# Altium PCB NBP-28 Rev 1.00.PCBDOC (part 2 of 6)
Units mil, origin at the board's own origin, x right, y up, seen from the top; angles counter-clockwise.
Board outline 2716.54 x 3917.15 mil, 8 copper layers (Top Layer, MidLayer3, MidLayer1, VCC, Gnd, VCCINT, MidLayer2, Bottom Layer), stack 59.043 mil thick; 229 components, 429 nets, 1584 pads, 1020 vias.
Unrouted connection lines stored in the file: 302.
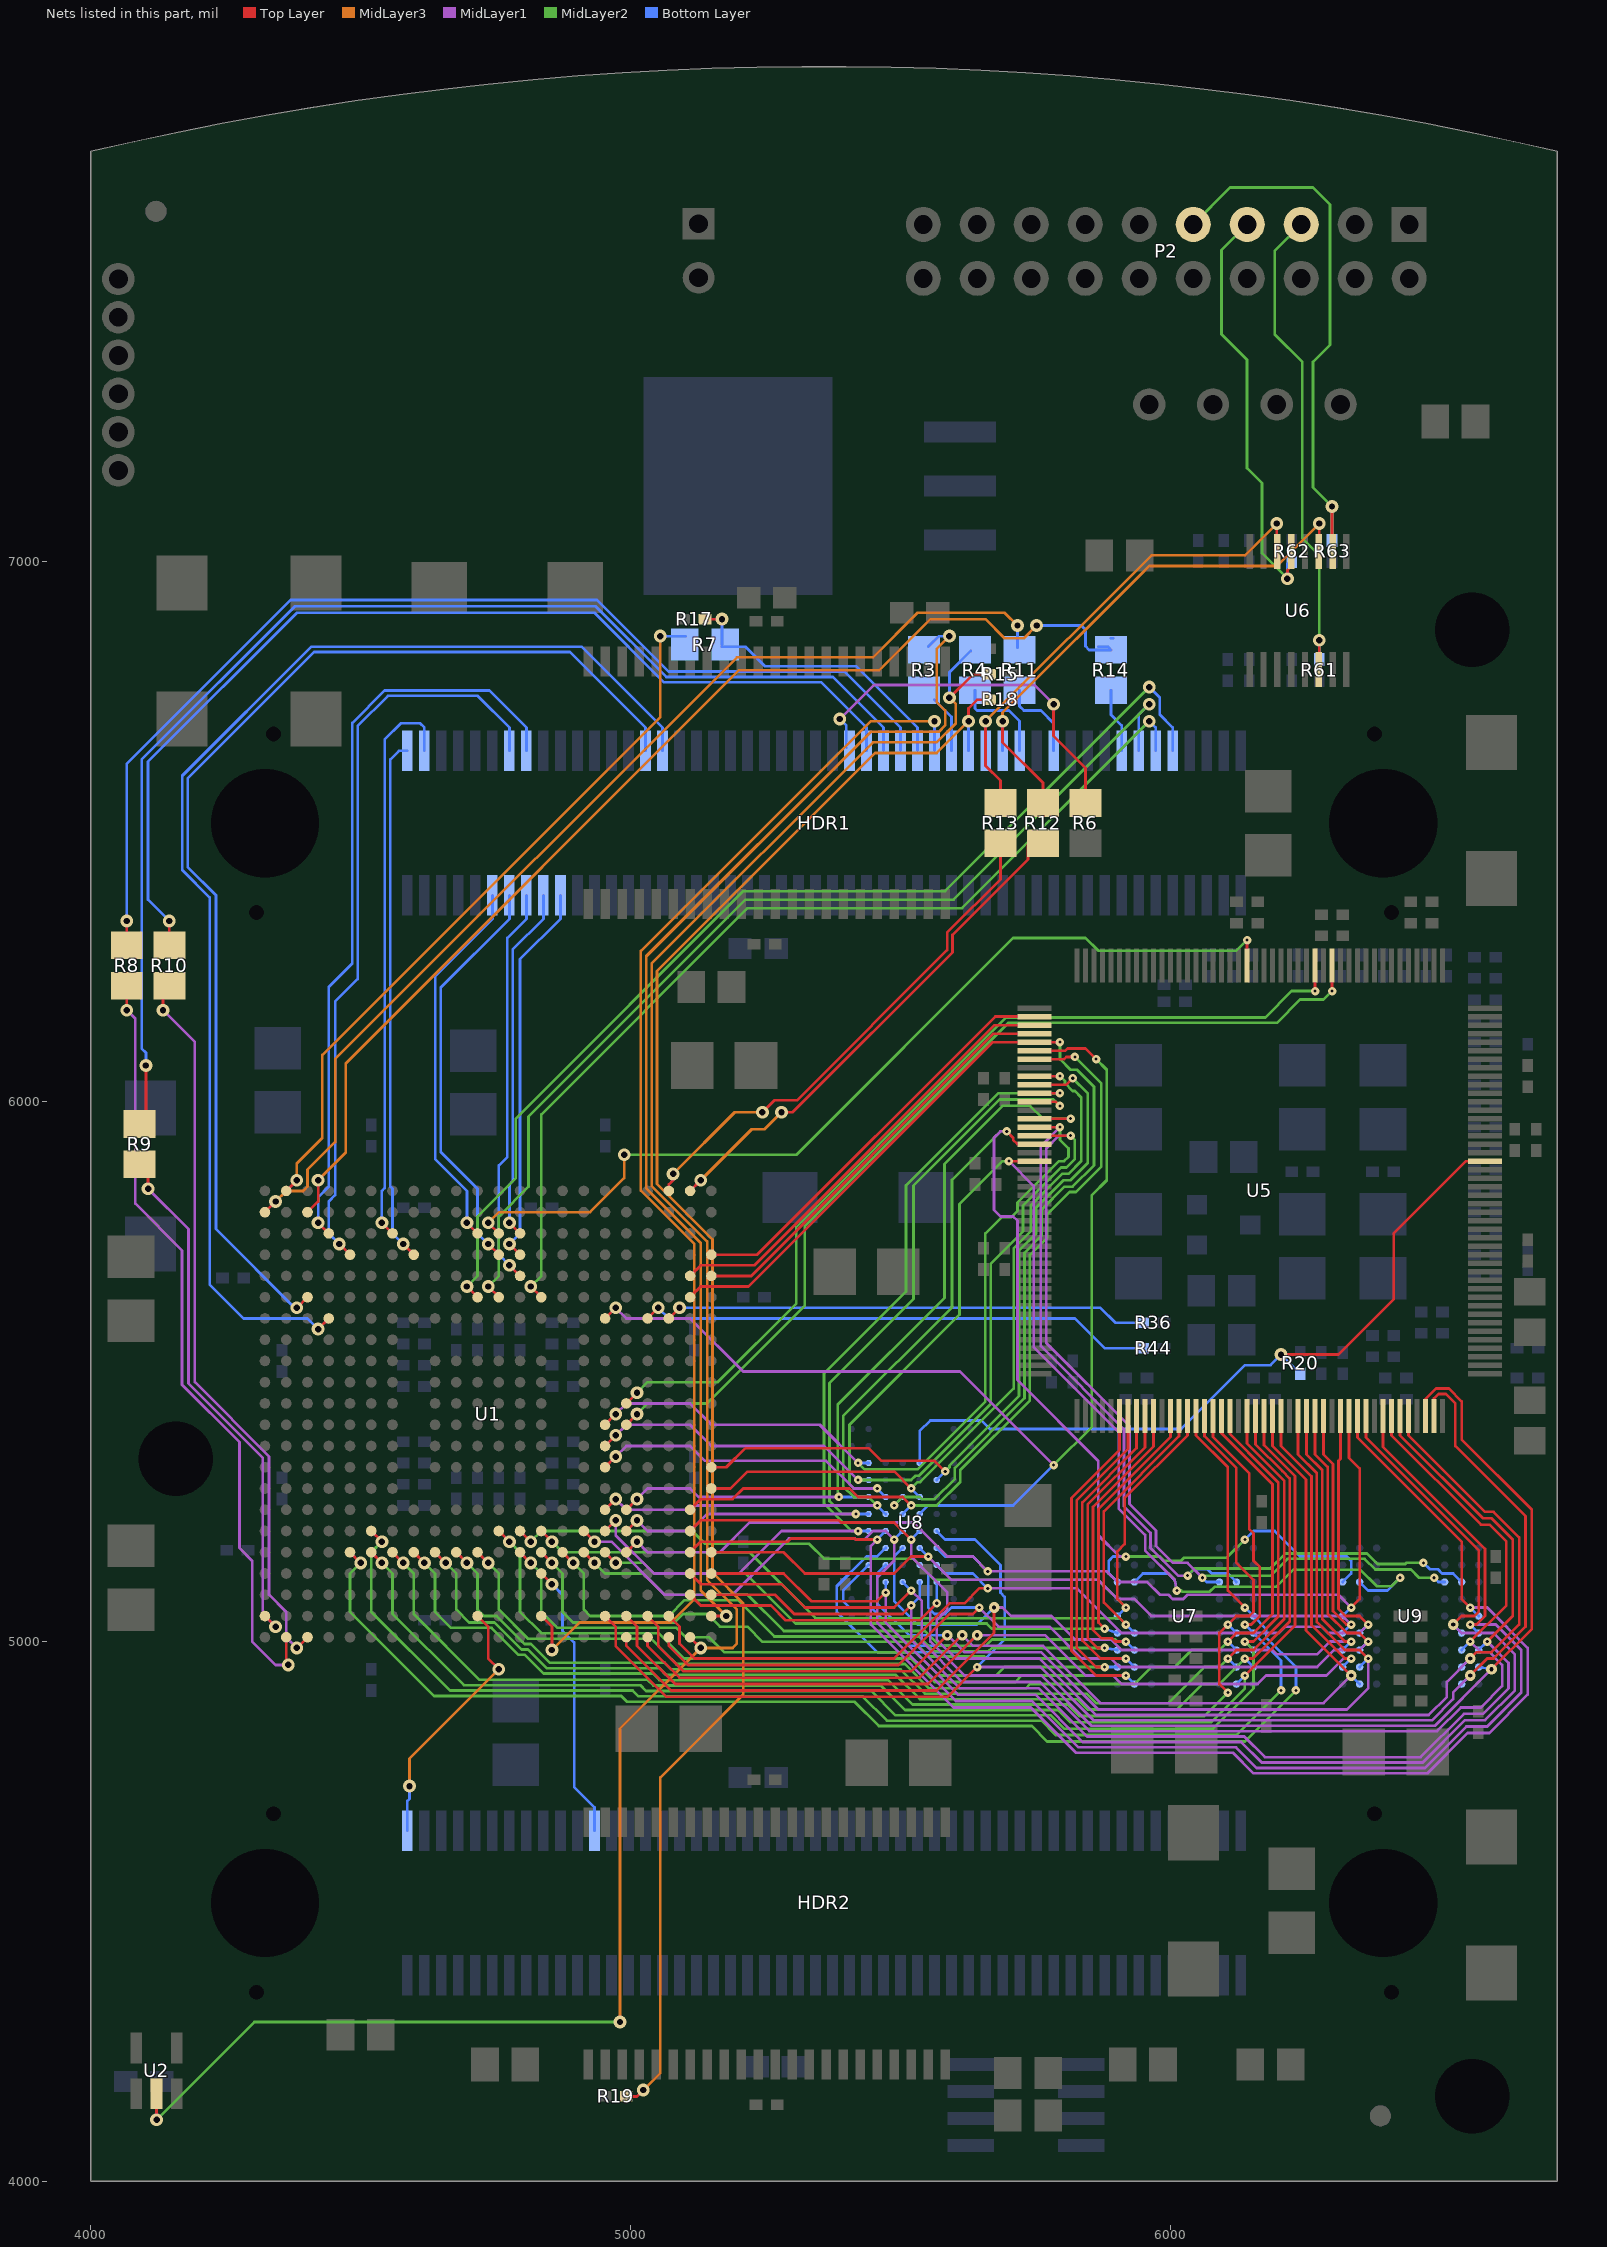
[diagram p8: the nets of this part, all layers, seen from the top]

## Via types
v1: diameter 23.62, hole 11.81, Top Layer to Bottom Layer, 614 vias
v2: diameter 15.75, hole 5.91, Top Layer to Bottom Layer, 214 vias
v3: diameter 78.74, hole 47.24, Top Layer to Bottom Layer, 101 vias
v4: diameter 35.43, hole 19.68, Top Layer to Bottom Layer, 59 vias
v5: diameter 19.68, hole 7.87, Top Layer to Bottom Layer, 32 vias

## Nets (pads, with @x,y where several pads share a name; then routed paths per layer and width w, separated by ;. In a path a pad name is that pad's centre, name@x,y a point inside that pad or via, vN(x,y) a via of type N, cw(c..) or ccw(c..) an arc to the next point about the centre after c; other vN are vias at no path point) (continued)
A11: U1.P17 U5.19 U7.G2 U8.E6 U9.G2 | length 2975.2
  Top Layer w5: U1.P17@4952.76,5322.84 v1(4972.44,5342.52) ; v2(5700.79,5889.76) U5.19@5748.03,5889.76
  MidLayer1 w5: v1(4972.44,5342.52) 4992.13,5362.21 5110.24,5362.21 5137.8,5334.65 5362.21,5334.65 5413.39,5283.47 v2(5456.69,5283.47) ; v2(5700.79,5889.76) 5746.54,5844.02 5746.54,5545.53 5904.02,5388.05 5904.02,5246.32 5953.07,5197.26 5953.07,5168.98 6007.88,5114.17 v2(6011.81,5094.49)
  MidLayer2 w5: v2(5456.69,5283.47) 5413.39,5283.47 5405.51,5291.34 5405.51,5401.58 5609.29,5605.35 5609.29,5810.08 5688.98,5889.76 v2(5700.79,5889.76) ; v2(6011.81,5094.49) 6019.69,5094.49 6021.81,5092.36 6072.68,5092.36 6082.05,5101.73 6196.22,5101.73 6227.72,5133.23 6351.34,5133.23 6382.2,5102.36 6409.45,5102.36 v2(6425.2,5118.11)
  Bottom Layer w5: v2(5456.69,5283.47) U8.E6@5472.44,5267.72 ; U7.G2@5933.07,5110.24 5948.82,5125.98 5996.06,5125.98 6007.88,5114.17 v2(6011.81,5094.49) ; U9.G2@6350.4,5110.24 6366.14,5094.49 6401.58,5094.49 v2(6425.2,5118.11)
A12: U1.T17 U5.17 U7.G1 U8.F6 U9.G1 | length 2963.9
  Top Layer w5: U1.T17@4948.82,5240.16 U1.T17@4952.76,5244.09 v1@4968.51,5259.84 ; v2(5696.85,5944.88) 5708.66,5933.07 5708.66,5929.13 5716.54,5921.26
  MidLayer1 w5: v1(4972.44,5263.78) 4992.13,5244.1 5110.24,5244.1 5118.11,5251.97 v2(5456.69,5251.97) ; v2(5696.85,5944.88) 5685.04,5944.88 5673.23,5933.07 5673.23,5799.21 5685.04,5787.4 5708.66,5787.4 5716.54,5779.53 5716.54,5484.25 5866.14,5334.65 5866.14,5196.85 5905.51,5157.48 v2(5917.32,5157.48)
  MidLayer2 w5: v2(5456.69,5251.97) 5440.95,5267.72 5413.39,5267.72 5393.7,5287.4 5393.7,5417.32 5595.36,5618.98 5595.36,5855.2 5685.04,5944.88 v2(5696.85,5944.88) ; v2(5917.32,5157.48) 5980.32,5157.48 5988.19,5149.61 6019.69,5149.61 6025.43,5155.35 6104.17,5155.35 v2(6137.8,5188.98)
  Bottom Layer w5: v2(5456.69,5251.97) U8.F6@5472.44,5236.22 ; U7.G1@5901.58,5110.24 5885.83,5125.98 5885.83,5149.61 5893.7,5157.48 v2(5917.32,5157.48) ; v2(6137.8,5188.98) 6153.54,5204.72 6192.91,5204.72 6240.16,5157.48 6326.77,5157.48 6334.65,5149.61 6334.65,5125.98 U9.G1@6318.9,5110.24
A13: U1.N17 U5.16 U7.G7 U8.D7 U9.G7 | length 2992.3
  Top Layer w5: U1.N17@4952.76,5362.21 v1(4972.44,5381.89) ; U5.16@5748.03,5937.01 5787.4,5937.01 v2(5814.96,5937.01)
  MidLayer1 w5: v1(4972.44,5381.89) 4992.13,5401.58 5110.24,5401.58 5149.61,5362.21 5358.27,5362.21 v2(5421.26,5299.21) ; v2(5814.96,5937.01) 5793.67,5937.01 5769.84,5913.18 5769.84,5552.99 5924.02,5398.82 5924.02,5254.6 5973.07,5205.55 5973.07,5177.26 6004.66,5145.67 6031.5,5145.67 v2(6059.06,5118.11)
  MidLayer2 w5: v2@5420.56,5299.92 5419.85,5299.21 v2(5421.26,5299.21) 5519.69,5299.21 5527.56,5307.09 5533.83,5307.09 5667.17,5440.43 5667.17,5699.96 5726.79,5759.58 5726.79,5807.66 5797.09,5877.95 5807.09,5877.95 5822.84,5893.7 5822.84,5929.13 v2(5814.96,5937.01) ; v2(6059.06,5118.11) 6062.68,5121.73 6185.25,5121.73 6216.74,5153.23 6359.62,5153.23 6379.3,5133.54 6445.2,5133.54 6460.63,5118.11 v2(6488.19,5118.11)
  Bottom Layer w5: v2(5421.26,5299.21) U8.D7@5440.95,5299.21 ; v2(6059.06,5118.11) 6066.93,5110.24 U7.G7@6090.55,5110.24 ; v2(6488.19,5118.11) 6496.06,5110.24 U9.G7@6507.88,5110.24
A14: U1.M17 U5.15 U7.G8 U8.C7 U9.G8 | length 3106.5
  Top Layer w5: U1.M17@4952.76,5401.58 v1(4972.44,5421.26) ; U5.15@5748.03,5952.76 v2(5795.28,5952.76)
  MidLayer1 w5: v1(4972.44,5421.26) 4992.13,5440.95 5110.24,5440.95 5149.61,5401.58 5350.4,5401.58 v2(5421.26,5330.71) ; v2(5795.28,5952.76) 5759.84,5917.32 5759.84,5547.24 5914.02,5393.07 5914.02,5250.46 5963.07,5201.4 5963.07,5173.12 6014.14,5122.05 v2(6031.5,5122.05)
  MidLayer2 w5: v2(5421.26,5330.71) 5433.07,5318.9 5531.5,5318.9 5657.17,5444.57 5657.17,5755.59 5687.17,5785.59 5704.73,5785.59 5716.79,5797.66 5716.79,5812.88 5793.67,5889.76 5803.15,5889.76 5811.02,5897.64 5811.02,5913.39 5795.28,5929.13 v2(5795.28,5952.76) ; v2(6031.5,5122.05) 6044.8,5135.35 6184.73,5135.35 6212.6,5163.23 6363.76,5163.23 6383.45,5143.54 6434.88,5143.54 6437.01,5145.67 v2(6468.51,5145.67)
  Bottom Layer w5: v2(5421.26,5330.71) U8.C7@5440.95,5330.71 ; v2(6031.5,5122.05) 6043.31,5133.86 6068.54,5133.86 6076.41,5125.98 6106.3,5125.98 U7.G8@6122.05,5110.24 ; v2(6468.51,5145.67) 6480.32,5133.86 6495.34,5133.86 6503.21,5125.98 6523.62,5125.98 U9.G8@6539.37,5110.24
A15: U1.T18 U5.14 U8.E7 | length 1526.1
  Top Layer w5: U1.T18@4992.13,5244.09 v1(5011.81,5263.78) ; U5.14@5748.03,5968.5 v2(5814.96,5968.5)
  MidLayer1 w5: v1(5011.81,5263.78) 5031.5,5283.47 5110.24,5283.47 5125.99,5267.72 v2(5385.83,5267.72)
  MidLayer2 w5: v2(5385.83,5267.72) 5383.7,5269.84 5383.7,5438.82 5581.42,5636.54 5581.42,5884.57 5688.98,5992.13 5740.16,5992.13 5763.78,5968.5 v2(5814.96,5968.5)
  Bottom Layer w5: v2(5385.83,5267.72) U8.E7@5440.95,5267.72
A16: U1.U18 U5.12 U8.F7 | length 1578.8
  Top Layer w5: U1.U18@4992.13,5204.72 v1(5011.81,5224.41) ; U5.12@5748.03,6000 5787.4,6000 v2(5795.28,5992.13)
  MidLayer1 w5: v1(5011.81,5224.41) 5031.5,5204.72 5110.24,5204.72 5141.73,5236.22 v2(5417.32,5236.22)
  MidLayer2 w5: v2(5417.32,5236.22) 5392.1,5236.22 5368.27,5260.05 5368.27,5478.5 5524.17,5634.41 5524.17,5844.68 5683.43,6003.94 5783.47,6003.94 v2(5795.28,5992.13)
  Bottom Layer w5: v2(5417.32,5236.22) U8.F7@5440.95,5236.22
A17: U1.U17 U5.11 U8.G7 | length 1725
  Top Layer w5: U1.U17@4948.82,5200.79 U1.U17@4952.76,5204.72 v1@4968.51,5220.47 ; U5.11@5748.03,6015.75 v2(5795.28,6015.75)
  MidLayer1 w5: v1(4972.44,5224.41) 4972.44,5196.85 5043.31,5125.98 5200.79,5125.98 5279.53,5204.72 v2(5421.26,5204.72)
  MidLayer2 w5: v2(5421.26,5204.72) 5409.45,5204.72 5358.27,5255.91 5358.27,5496.06 5510.24,5648.03 5510.24,5844.88 5681.1,6015.75 v2(5795.28,6015.75)
  Bottom Layer w5: v2(5421.26,5204.72) U8.G7@5440.95,5204.72
A18: U1.P22 U5.10 U8.D3 | length 1420.5
  Top Layer w5: U1.P22@5149.61,5322.84 5177.17,5322.84 5212.6,5358.27 5440.95,5358.27 5464.57,5334.65 5562.99,5334.65 v2(5582.68,5314.96) ; U5.10@5748.03,6031.5 5807.09,6031.5 v2(5818.9,6043.31)
  MidLayer2 w5: v2(5582.68,5314.96) 5590.55,5322.84 5590.55,5325.89 5719.53,5454.87 5719.53,5724.04 5751.34,5755.85 5751.34,5803.92 5801.75,5854.33 5814.96,5854.33 5846.46,5885.83 5846.46,6015.75 v2(5818.9,6043.31)
  Bottom Layer w5: U8.D3@5566.93,5299.21 v2(5582.68,5314.96)
A19: U1.R22 U5.9 U8.E4 | length 1387.8
  Top Layer w5: U1.R22@5149.61,5283.47 5185.04,5283.47 5216.22,5314.65 5488.51,5314.65 v2(5519.69,5283.47) ; U5.9@5748.03,6047.24 v2(5795.28,6047.24)
  MidLayer2 w5: v2(5519.69,5283.47) 5531.5,5295.28 5536.16,5295.28 5709.53,5468.65 5709.53,5728.18 5741.34,5759.99 5741.34,5808.06 5799.42,5866.14 5811.03,5866.14 5834.65,5889.76 5834.65,6007.87 5822.84,6019.69 5818.9,6019.69 5804.44,6034.14 5804.44,6038.08 v2(5795.28,6047.24)
  Bottom Layer w5: v2(5519.69,5283.47) U8.E4@5535.43,5267.72
A20: U1.T21 U5.7 U8.F5 | length 1569
  Top Layer w5: U1.T21@5110.24,5244.09 5129.92,5263.78 5188.98,5263.78 5208.66,5283.47 5405.51,5283.47 5421.26,5267.72 5503.94,5267.72 v2(5519.69,5251.97) ; U5.7@5748.03,6078.74 5803.15,6078.74 5807.09,6082.68 v2(5822.84,6082.68)
  MidLayer2 w5: v2(5519.69,5251.97) 5566.93,5251.97 5610.55,5295.59 5610.55,5317.61 5739.53,5446.58 5739.53,5715.75 5771.34,5747.56 5771.34,5791.02 5812.84,5832.52 5824.65,5832.52 5871.89,5879.76 5871.89,6033.62 v2(5822.84,6082.68)
  Bottom Layer w5: U8.F5@5503.94,5236.22 v2(5519.69,5251.97)
A21: U1.G17 U5.6 U8.F4 | length 2169.9
  Top Layer w5: U1.G17@4952.76,5598.43 v1(4972.44,5618.11) ; U5.6@5748.03,6094.49 5805.12,6094.49 5809.06,6098.43 5842.52,6098.43 v2(5862.21,6078.74)
  MidLayer1 w5: v1(4972.44,5618.11) 4992.13,5598.43 5110.24,5598.43 5208.66,5500 5610.24,5500 v2(5783.47,5326.77)
  MidLayer2 w5: v2(5783.47,5326.77) 5854.33,5397.64 5854.33,5826.77 5881.89,5854.33 5881.89,6059.06 v2(5862.21,6078.74)
  Bottom Layer w5: U8.F4@5535.43,5236.22 5551.18,5251.97 5708.66,5251.97 v2(5783.47,5326.77)
A22: U1.F21 U5.5 U8.E5 | length 1996.4
  Top Layer w5: U1.F21@5110.24,5637.8 5129.92,5657.48 5217.99,5657.48 5670.74,6110.24 U5.5@5748.03,6110.24 v2(5795.28,6110.24)
  MidLayer2 w5: v2(5488.19,5251.97) 5503.94,5267.72 5535.43,5267.72 5539.37,5263.78 5562.99,5263.78 5600.55,5301.34 5600.55,5321.75 5729.53,5450.73 5729.53,5719.89 5761.34,5751.7 5761.34,5799.78 5804.08,5842.52 5818.9,5842.52 5858.27,5881.89 5858.27,6027.56 5826.77,6059.06 5814.96,6059.06 5795.28,6078.74 v2(5795.28,6110.24)
  Bottom Layer w5: v2(5488.19,5251.97) U8.E5@5503.94,5267.72
A23: U1.E22 U5.4 | length 784.3
  Top Layer w5: U1.E22@5149.61,5677.17 5223.53,5677.17 5672.35,6125.98 U5.4@5748.03,6125.98
A24: U1.E21 U5.3 | length 830.2
  Top Layer w5: U1.E21@5110.24,5677.17 5129.92,5696.85 5229.07,5696.85 5673.95,6141.73 U5.3@5748.03,6141.73
A25: U1.D22 U5.2 | length 781.1
  Top Layer w5: U1.D22@5149.61,5716.54 5234.62,5716.54 5675.56,6157.48 U5.2@5748.03,6157.48
AUDIO_SPI_CSN: HDR1.11 U1.C11 | length 702.1
  Top Layer w5: v1(4696.85,5775.59) U1.C11@4716.54,5755.91
  Bottom Layer w5: v1(4696.85,5775.59) 4696.85,5834.65 4638.43,5893.07 4638.43,6232.91 4744.09,6338.58 HDR1.11@4744.09,6381.89
BLUE0: HDR1.14 U1.D5 | length 1389.4
  Top Layer w5: v1(4460.63,5736.22) U1.D5@4480.32,5716.54
  Bottom Layer w5: v1(4460.63,5736.22) 4440.95,5755.91 4440.95,5814.96 4452.76,5826.77 4452.76,6185.04 4494.62,6226.9 4494.62,6695.61 4550.62,6751.61 4716.9,6751.61 4775.59,6692.91 HDR1.14@4775.59,6649.61
BLUE1: HDR1.16 U1.C4 | length 1399.2
  Top Layer w5: v1(4421.26,5775.59) U1.C4@4440.95,5755.91
  Bottom Layer w5: v1(4421.26,5775.59) 4421.26,5822.84 4440.95,5842.52 4440.95,6212.6 4484.62,6256.27 4484.62,6701.61 4544.62,6761.61 4738.39,6761.61 4807.09,6692.91 HDR1.16@4807.09,6649.61
BOC_CTS: HDR1.13 U1.D12 | length 762.5
  Top Layer w5: v1(4736.22,5736.22) U1.D12@4755.91,5716.54
  Bottom Layer w5: v1(4736.22,5736.22) 4716.54,5755.91 4716.54,5838.58 4648.43,5906.69 4648.43,6211.42 4775.59,6338.58 HDR1.13@4775.59,6381.89
BOC_RTS: HDR1.17 U1.C13 | length 660.2
  Top Layer w5: v1(4775.59,5775.59) U1.C13@4795.28,5755.91
  Bottom Layer w5: v1(4775.59,5775.59) 4775.59,5846.46 4781.65,5852.52 4781.65,6281.66 4838.58,6338.58 HDR1.17@4838.58,6381.89
BOC_RX: HDR1.19 U1.D13 | length 712.6
  Top Layer w5: v1(4775.59,5736.22) U1.D13@4795.28,5716.54
  Bottom Layer w5: v1(4775.59,5736.22) 4795.28,5755.91 4795.28,6263.78 4870.08,6338.58 HDR1.19@4870.08,6381.89
BOC_TX: HDR1.15 U1.E13 | length 742.2
  Top Layer w5: v1(4775.59,5696.85) U1.E13@4795.28,5677.17
  Bottom Layer w5: v1(4775.59,5696.85) 4755.91,5716.54 4755.91,5881.89 4771.65,5897.64 4771.65,6303.15 4807.09,6338.58 HDR1.15@4807.09,6381.89
BUZZER: HDR2.24 U1.W14 | length 517.1
  Top Layer w5: U1.W14@4834.65,5125.98 v1(4854.33,5106.3)
  Bottom Layer w5: v1(4854.33,5106.3) 4874.02,5086.61 4874.02,5019.69 4895.51,4998.19 4895.51,4730.47 4933.07,4692.91 HDR2.24@4933.07,4649.61
CAN_RXD: HDR1.4 U1.C7 | length 1057.6
  Top Layer w5: v1(4539.37,5775.59) U1.C7@4559.06,5755.91
  Bottom Layer w5: v1(4539.37,5775.59) 4539.37,5834.65 4544.62,5839.89 4544.62,6670.6 4574.8,6700.79 4610.24,6700.79 4618.11,6692.91 HDR1.4@4618.11,6649.61
CAN_TXD: HDR1.2 U1.D8 | length 973.3
  Top Layer w5: v1(4578.74,5736.22) U1.D8@4598.43,5716.54
  Bottom Layer w5: v1(4578.74,5736.22) 4559.06,5755.91 4559.06,5838.58 4555.12,5842.52 4555.12,6633.86 4570.87,6649.61 HDR1.2@4586.61,6649.61
CLK_RTC: R44.2 U1.G19 | length 956.5
  Top Layer w5: U1.G19@5031.5,5598.43 v1(5051.18,5618.11)
  Bottom Layer w5: v1(5051.18,5618.11) 5070.87,5598.43 5822.84,5598.43 5877.95,5543.31 R44.2@5948.82,5543.31
CLKIN: R36.2 U1.G20 | length 897.5
  Top Layer w5: U1.G20@5070.87,5598.43 v1(5090.55,5618.11)
  Bottom Layer w5: v1(5090.55,5618.11) 5870.08,5618.11 5897.64,5590.55 R36.2@5948.82,5590.55
CLKOUT: U1.C12 U5.156 | length 1742.4
  Top Layer w5: v1(4736.22,5775.59) U1.C12@4755.91,5755.91 ; U5.156@6141.73,6251.97 v2(6141.73,6299.21)
  MidLayer2 w5: v1(4988.19,5901.58) 5307.09,5901.58 5708.66,6303.15 5842.52,6303.15 5866.14,6279.53 6122.05,6279.53 v2(6141.73,6299.21)
  MidLayer3 w5: v1(4736.22,5775.59) 4755.91,5795.28 4925.2,5795.28 4988.19,5858.27 v1(4988.19,5901.58)
D0: U1.AA17 U5.87 U8.G3 U9.A8 | length 2860.2
  Top Layer w5: U1.AA17@4952.76,5047.24 4972.44,5027.56 4972.44,4992.13 5066.93,4897.64 5586.62,4897.64 v2(5641.73,4952.76) ; U5.87@6488.19,5417.32 6488.19,5450.42 6496.27,5458.5 6510,5458.5 6527.56,5440.95 6527.56,5362.21 6657.48,5232.28 6657.48,5027.56 6598.43,4968.5 6586.62,4968.5 v5(6555.12,4937.01)
  MidLayer1 w5: v2(5641.73,4952.76) 5759.12,4952.76 5857.86,4854.02 6483.94,4854.02 6523.62,4893.7 6523.62,4905.51 v5(6555.12,4937.01)
  Bottom Layer w5: U8.G3@5566.93,5204.72 5582.68,5188.98 5637.8,5188.98 5685.04,5141.73 5685.04,5090.55 5692.91,5082.68 5692.91,5003.94 v2(5641.73,4952.76) ; U9.A8@6539.37,4921.26 v5(6555.12,4937.01)
D1: U1.Y21 U5.86 U8.K3 U9.B9 | length 2473
  Top Layer w5: U1.Y21@5110.24,5086.61 5129.92,5066.93 5259.84,5066.93 5287.4,5039.37 5535.43,5039.37 v2(5566.93,5070.87) ; U5.86@6472.44,5417.32 6472.44,5448.82 6492.13,5468.5 6515.75,5468.5 6539.37,5444.88 6539.37,5374.02 6669.29,5244.09 6669.29,5023.62 v5(6594.49,4948.82)
  MidLayer1 w5: v2(5566.93,5070.87) 5555.12,5059.06 5555.12,5000 5618.11,4937.01 5760.72,4937.01 5853.72,4844.02 6489.69,4844.02 v5(6594.49,4948.82)
  Bottom Layer w5: v2(5566.93,5070.87) U8.K3@5566.93,5110.24 ; U9.B9@6570.87,4952.76 v5(6594.49,4948.82)
D2: U1.U21 U5.84 U8.G4 U9.B8 | length 2399.8
  Top Layer w5: U1.U21@5110.24,5204.72 5129.92,5224.41 5385.83,5224.41 5389.77,5220.47 5488.19,5220.47 v2(5519.69,5188.98) ; U5.84@6440.95,5417.32 6440.95,5381.89 6582.68,5240.16 6598.43,5240.16 6645.67,5192.91 6645.67,5031.5 6594.49,4980.32 6566.93,4980.32 v5(6555.12,4968.5)
  MidLayer1 w5: v2(5519.69,5188.98) 5519.69,5157.48 5586.62,5090.55 5586.62,5059.06 5566.93,5039.37 5566.93,5003.94 5602.36,4968.5 5757.51,4968.5 5862,4864.02 6478.19,4864.02 6511.81,4897.64 6511.81,4925.2 v5(6555.12,4968.5)
  Bottom Layer w5: v2(5519.69,5188.98) U8.G4@5535.43,5204.72 ; U9.B8@6539.37,4952.76 v5(6555.12,4968.5)
D3: U1.Y22 U5.83 U8.K4 U9.C9 | length 2411.3
  Top Layer w5: U1.Y22@5149.61,5086.61 5267.72,5086.61 5303.15,5051.18 5503.94,5051.18 v2(5519.69,5066.93) ; U5.83@6425.2,5417.32 6425.2,5381.89 6578.74,5228.35 6594.49,5228.35 6633.86,5188.98 6633.86,5047.24 v2(6586.62,5000)
  MidLayer1 w5: v2(5519.69,5066.93) 5519.69,5003.94 5610.24,4913.39 5756.06,4913.39 5845.43,4824.02 6136.62,4824.02 6174.73,4785.91 6463.07,4785.91 6543.31,4866.14 6578.74,4866.14 6625.99,4913.39 6625.99,4960.63 v2(6586.62,5000)
  Bottom Layer w5: v2(5519.69,5066.93) 5535.43,5082.68 U8.K4@5535.43,5110.24 ; U9.C9@6570.87,4984.25 v2(6586.62,5000)
D4: U1.W21 U5.82 U8.K5 U9.C8 | length 2432.5
  Top Layer w5: U1.W21@5110.24,5125.98 5129.92,5106.3 5279.53,5106.3 5322.84,5062.99 5488.19,5062.99 v2(5519.69,5094.49) ; U5.82@6409.45,5417.32 6409.45,5381.89 6574.8,5216.54 6590.55,5216.54 6622.05,5185.04 6622.05,5066.93 v2(6555.12,5000)
  MidLayer1 w5: v2(5519.69,5094.49) 5539.37,5074.8 5539.37,5000 5614.17,4925.2 5758.39,4925.2 5849.57,4834.02 6493.83,4834.02 6537.77,4877.95 6574.8,4877.95 6614.17,4917.32 6614.17,4956.69 6590.55,4980.32 6574.8,4980.32 v2(6555.12,5000)
  Bottom Layer w5: U8.K5@5503.94,5110.24 v2(5519.69,5094.49) ; U9.C8@6539.37,4984.25 v2(6555.12,5000)
D5: U1.U16 U5.81 U8.G5 U9.D9 | length 2929.3
  Top Layer w5: U1.U16@4913.39,5204.72 v1(4933.07,5185.04) ; U5.81@6393.7,5417.32 6393.7,5360.6 6582.68,5171.62 6582.68,5047.24 6566.93,5031.5 v2(6555.12,5031.5)
  MidLayer1 w5: v1(4933.07,5185.04) 4964.57,5185.04 5062.99,5086.61 5188.98,5086.61 5293.04,5190.68 5415.01,5190.68 5416.71,5188.98 5433.07,5188.98 5448.82,5204.72 5472.44,5204.72 v2(5488.19,5188.98) 5488.19,5149.61 5456.69,5118.11 5456.69,5035.43 5602.36,4889.76 5743.53,4889.76 5829.27,4804.02 6121.18,4804.02 6159.29,4765.91 6471.36,4765.91 6547.97,4842.52 6586.62,4842.52 6649.61,4905.51 6649.61,4984.25 6602.36,5031.5 v2(6555.12,5031.5)
  Bottom Layer w5: v2(5488.19,5188.98) U8.G5@5503.94,5204.72 ; v2(6555.12,5031.5) U9.D9@6570.87,5015.75
D6: U1.W22 U5.79 U8.K6 U9.D8 | length 2485.4
  Top Layer w5: U1.W22@5149.61,5125.98 5283.47,5125.98 5334.65,5074.8 5456.69,5074.8 v2(5472.44,5090.55) ; U5.79@6362.21,5417.32 6362.21,5377.95 6570.87,5169.29 6570.87,5055.12 6562.99,5047.24 6539.37,5047.24 v5(6523.62,5031.5)
  MidLayer1 w5: v2(5472.44,5090.55) 5472.44,5035.43 5606.3,4901.58 5749.79,4901.58 5837.35,4814.02 6130.87,4814.02 6168.98,4775.91 6467.21,4775.91 6545.64,4854.33 6582.68,4854.33 6637.8,4909.45 6637.8,4976.38 6598.43,5015.75 6539.37,5015.75 v5(6523.62,5031.5)
  Bottom Layer w5: v2(5472.44,5090.55) U8.K6@5472.44,5110.24 ; v5(6523.62,5031.5) U9.D8@6539.37,5015.75
D7: U1.V21 U5.78 U8.G6 U9.E9 | length 2620.3
  Top Layer w5: U1.V21@5110.24,5165.35 5129.92,5185.04 5291.34,5185.04 5296.98,5190.68 5415.01,5190.68 5416.71,5188.98 v2(5456.69,5188.98) ; U5.78@6346.46,5417.32 6346.46,5377.95 6539.37,5185.04 6539.37,5078.74 v2(6555.12,5062.99)
  MidLayer1 w5: v2(5456.69,5188.98) 5444.88,5177.17 5444.88,5031.5 5598.43,4877.95 5741.19,4877.95 5825.13,4794.02 6115.43,4794.02 6153.54,4755.91 6475.5,4755.91 6550.3,4830.71 6590.55,4830.71 6661.42,4901.58 6661.42,4988.19 6586.62,5062.99 v2(6555.12,5062.99)
  Bottom Layer w5: v2(5456.69,5188.98) U8.G6@5472.44,5204.72 ; v2(6555.12,5062.99) U9.E9@6570.87,5047.24
D8: U1.V18 U5.77 U8.H3 U9.E1 | length 1957.1
  Top Layer w5: U1.V18@4992.13,5165.35 v1(5011.81,5185.04) ; U5.77@6330.71,5417.32 6330.71,5340.19 6350.4,5320.5 6350.4,5078.74 v2(6334.65,5062.99)
  MidLayer1 w5: v1(5011.81,5185.04) 5031.5,5165.35 5165.36,5165.35 5220.47,5220.47 5523.62,5220.47 5586.62,5157.48 5633.86,5157.48 v2(5661.42,5129.92) 5881.89,5129.92 5901.58,5110.24 5956.69,5110.24 5980.32,5086.61 5996.06,5086.61 6003.94,5078.74 6023.62,5078.74 6031.5,5086.61 6311.02,5086.61 v2(6334.65,5062.99)
  Bottom Layer w5: U8.H3@5566.93,5173.23 5582.68,5157.48 5633.86,5157.48 v2(5661.42,5129.92) ; U9.E1@6318.9,5047.24 v2(6334.65,5062.99)
D9: U1.AA20 U5.76 U8.J3 U9.D2 | length 2011
  Top Layer w5: U1.AA20@5070.87,5047.24 5090.55,5027.56 5090.55,4996.06 5118.11,4968.5 5488.19,4968.5 5590.55,5070.87 5618.11,5070.87 5645.67,5098.43 v2(5661.42,5098.43) ; U5.76@6314.96,5417.32 6314.96,5338.58 6311.02,5334.65 6311.02,5060.46 6324.24,5047.24 6350.4,5047.24 v2(6366.14,5031.5)
  MidLayer1 w5: v2(5661.42,5098.43) 5826.77,5098.43 5909.45,5015.75 6200.79,5015.75 6212.6,5027.56 6279.53,5027.56 6291.34,5015.75 6350.4,5015.75 v2(6366.14,5031.5)
  Bottom Layer w5: U8.J3@5566.93,5141.73 5582.68,5125.98 5633.86,5125.98 v2(5661.42,5098.43) ; U9.D2@6350.4,5015.75 v2(6366.14,5031.5)
D10: U1.V22 U5.74 U8.H4 U9.D1 | length 1723.4
  Top Layer w5: U1.V22@5149.61,5165.35 5283.47,5165.35 5322.84,5125.98 5488.19,5125.98 5519.69,5157.48 v2(5551.18,5157.48) ; U5.74@6283.47,5417.32 6283.47,5346.46 6301.02,5328.9 6301.02,5056.21 6325.73,5031.5 v2(6334.65,5031.5)
  MidLayer1 w5: v2(5551.18,5157.48) 5594.49,5114.17 5866.14,5114.17 5901.58,5078.74 5933.07,5078.74 5964.57,5047.24 6318.9,5047.24 v2(6334.65,5031.5)
  Bottom Layer w5: U8.H4@5535.43,5173.23 v2(5551.18,5157.48) ; U9.D1@6318.9,5015.75 v2(6334.65,5031.5)
D11: U1.AB20 U5.73 U8.J4 U9.C2 | length 2118.7
  Top Layer w5: U1.AB20@5070.87,5007.87 5070.87,4992.13 5106.3,4956.69 5496.06,4956.69 5590.55,5051.18 5633.86,5051.18 v2(5645.67,5062.99) ; U5.73@6267.72,5417.32 6267.72,5346.46 6291.02,5323.15 6291.02,5051.5 6326.77,5015.75 6350.4,5015.75 v2(6366.14,5000)
  MidLayer1 w5: v2(5645.67,5062.99) 5681.1,5027.56 5775.59,5027.56 5834.65,4968.5 5889.77,4968.5 5905.51,4952.76 6271.65,4952.76 6303.15,4984.25 6350.4,4984.25 v2(6366.14,5000)
  Bottom Layer w5: U8.J4@5535.43,5141.73 5551.18,5125.98 5551.18,5062.99 5562.99,5051.18 5582.68,5051.18 5594.49,5062.99 v2(5645.67,5062.99) ; U9.C2@6350.4,4984.25 v2(6366.14,5000)
D12: U1.AB18 U5.72 U8.H5 U9.C1 | length 2331.2
  Top Layer w5: U1.AB18@4992.13,5007.87 4992.13,4992.13 5074.8,4909.45 5566.93,4909.45 5673.23,5015.75 v5(5673.23,5062.99) ; U5.72@6251.97,5417.32 6251.97,5346.46 6281.02,5317.4 6281.02,5041.81 6322.84,5000 v2(6334.65,5000)
  MidLayer1 w5: v5(5673.23,5062.99) 5688.98,5062.99 5704.73,5047.24 5779.53,5047.24 5822.84,5003.94 5889.77,5003.94 5909.45,4984.25 6188.98,4984.25 6196.85,4976.38 6271.65,4976.38 6295.28,5000 v2(6334.65,5000)
  Bottom Layer w5: U8.H5@5503.94,5173.23 5488.19,5157.48 5488.19,5074.8 5531.5,5031.5 5641.73,5031.5 v5(5673.23,5062.99) ; U9.C1@6318.9,4984.25 v2(6334.65,5000)
D13: U1.AA19 U5.71 U8.J6 U9.B2 | length 2326.8
  Top Layer w5: U1.AA19@5031.5,5047.24 5051.18,5027.56 5051.18,4992.13 5098.43,4944.88 5519.69,4944.88 v5(5586.62,5011.81) ; U5.71@6236.22,5417.32 6236.22,5346.46 6271.02,5311.65 6271.02,5036.06 6322.84,4984.25 6350.4,4984.25 v2(6366.14,4968.5)
  MidLayer1 w5: v5(5586.62,5011.81) 5618.11,4980.32 5759.84,4980.32 5866.14,4874.02 6326.77,4874.02 6366.14,4913.39 v2(6366.14,4968.5)
  Bottom Layer w5: U8.J6@5472.44,5141.73 5456.69,5125.98 5456.69,5070.87 5515.75,5011.81 v5(5586.62,5011.81) ; U9.B2@6350.4,4952.76 v2(6366.14,4968.5)
D14: U1.AA18 U5.69 U8.H6 U9.B1 | length 2512.9
  Top Layer w5: U1.AA18@4992.13,5047.24 5011.81,5027.56 5011.81,4992.13 5082.68,4921.26 5551.18,4921.26 v5(5641.73,5011.81) ; U5.69@6204.73,5417.32 6204.73,5362.2 6261.02,5305.91 6261.02,5030.32 6322.84,4968.5 v2(6334.65,4968.5)
  MidLayer1 w5: v5(5641.73,5011.81) 5767.72,5011.81 5842.52,4937.01 5893.7,4937.01 5909.45,4921.26 6161.42,4921.26 6177.17,4937.01 6288.85,4937.01 6320.35,4968.5 v2(6334.65,4968.5)
  Bottom Layer w5: U8.H6@5472.44,5173.23 5456.69,5157.48 5437.01,5157.48 5381.89,5102.36 5381.89,5055.12 5456.69,4980.32 5610.24,4980.32 v5(5641.73,5011.81) ; U9.B1@6318.9,4952.76 v2(6334.65,4968.5)
D15: U1.AB19 U5.68 U8.J7 U9.A2 | length 2361.7
  Top Layer w5: U1.AB19@5031.5,5007.87 5031.5,4992.13 5090.55,4933.07 5535.43,4933.07 v5(5614.17,5011.81) ; U5.68@6188.98,5417.32 6188.98,5362.2 6251.02,5300.16 6251.02,5020.63 v5(6334.65,4937.01)
  MidLayer1 w5: v5(5614.17,5011.81) 5633.86,4992.13 5763.78,4992.13 5870.08,4885.83 6283.47,4885.83 v5(6334.65,4937.01)
  Bottom Layer w5: U8.J7@5440.95,5141.73 5393.7,5094.49 5393.7,5074.8 5405.51,5062.99 5444.88,5062.99 5515.75,4992.13 5594.49,4992.13 v5(5614.17,5011.81) ; v5(6334.65,4937.01) U9.A2@6350.4,4921.26
D16: U1.V7 U5.67 U7.A8 | length 2367.5
  Top Layer w5: U1.V7@4559.06,5165.35 v1(4578.74,5145.67) ; v2(6137.8,4937.01) 6230.62,5029.83 6230.62,5306.27 6173.23,5363.66 U5.67@6173.23,5417.32
  MidLayer2 w5: v1(4578.74,5145.67) 4598.43,5125.98 4598.43,5051.18 4720.47,4929.13 5031.5,4929.13 5042.13,4918.5 5463.39,4918.5 5508.51,4873.39 5791.97,4873.39 5814.96,4850.39 6074.8,4850.39 6137.8,4913.39 v2(6137.8,4937.01)
  Bottom Layer w5: U7.A8@6122.05,4921.26 v2(6137.8,4937.01)
D17: U1.V9 U5.66 U7.B9 | length 2239.2
  Top Layer w5: U1.V9@4637.8,5165.35 v1(4657.48,5145.67) ; v2(6137.8,4968.5) 6152.51,4968.5 6220.62,5036.61 6220.62,5302.13 6207.09,5315.66 6157.48,5365.26 U5.66@6157.48,5417.32
  MidLayer2 w5: v1(4657.48,5145.67) 4677.17,5125.98 4677.17,5059.06 4700.79,5035.43 4748.03,5035.43 4798.03,4985.43 4809.84,4985.43 4844.65,4950.63 5053.31,4950.63 5065.43,4938.5 5490.63,4938.5 5535.75,4893.39 5827.09,4893.39 5846.46,4874.02 6011.81,4874.02 6059.06,4921.26 6090.55,4921.26 v2(6137.8,4968.5)
  Bottom Layer w5: v2(6137.8,4968.5) U7.B9@6153.54,4952.76
D18: U1.V10 U5.65 U7.B8 | length 2179.7
  Top Layer w5: U1.V10@4677.17,5165.35 v1(4696.85,5145.67) ; v2(6106.3,4968.5) 6122.05,4984.25 6153.54,4984.25 6210.62,5041.32 6210.62,5297.99 6141.73,5366.87 U5.65@6141.73,5417.32
  MidLayer2 w5: v1(4696.85,5145.67) 4716.54,5125.98 4716.54,5059.06 4728.35,5047.24 4751.97,5047.24 4803.78,4995.43 4815.59,4995.43 4850.4,4960.63 5062.99,4960.63 5075.12,4948.5 5500,4948.5 5545.12,4903.39 5844.65,4903.39 5862.21,4885.83 5996.06,4885.83 6062.99,4952.76 6090.55,4952.76 v2(6106.3,4968.5)
  Bottom Layer w5: v2(6106.3,4968.5) U7.B8@6122.05,4952.76
D19: U1.V6 U5.63 U7.C9 | length 2448.6
  Top Layer w5: U1.V6@4519.69,5165.35 v1(4539.37,5145.67) ; U5.63@6110.24,5417.32 6110.24,5384.22 6177.16,5317.3 6199.62,5294.84 6199.62,5046.07 6153.54,5000 v2(6137.8,5000)
  MidLayer2 w5: v1(4539.37,5145.67) 4559.06,5125.98 4559.06,5051.18 4691.1,4919.13 5017.88,4919.13 5028.51,4908.5 5445.83,4908.5 5490.95,4863.39 5778.35,4863.39 5803.15,4838.58 6078.74,4838.58 6153.54,4913.39 6153.54,4984.25 v2(6137.8,5000)
  Bottom Layer w5: v2(6137.8,5000) U7.C9@6153.54,4984.25
D20: U1.V11 U5.62 U7.C8 | length 2100.6
  Top Layer w5: U1.V11@4716.54,5165.35 v1(4736.22,5145.67) ; U5.62@6094.49,5417.32 6094.49,5385.83 6188.98,5291.34 6188.98,5051.18 6153.54,5015.75 6122.05,5015.75 v2(6106.3,5000)
  MidLayer2 w5: v1(4736.22,5145.67) 4755.91,5125.98 4755.91,5059.06 4809.53,5005.43 5037.88,5005.43 5084.8,4958.5 5507.88,4958.5 5552.99,4913.39 5732.28,4913.39 5740.16,4921.26 5933.07,4921.26 5964.57,4952.76 6007.88,4952.76 6039.37,4984.25 6090.55,4984.25 v2(6106.3,5000)
  Bottom Layer w5: v2(6106.3,5000) U7.C8@6122.05,4984.25
D21: U1.U6 U5.61 U7.D9 | length 2569.6
  Top Layer w5: U1.U6@4519.69,5204.72 v1(4539.37,5185.04) ; U5.61@6078.74,5417.32 6078.74,5378.68 6145.67,5311.75 6145.67,5208.66 6153.54,5200.79 6153.54,5149.61 6165.36,5137.8 6165.36,5047.24 6149.61,5031.5 v2(6137.8,5031.5)
  MidLayer2 w5: v1(4539.37,5185.04) 4519.69,5165.35 4519.69,5055.12 4665.67,4909.13 5003.94,4909.13 5014.57,4898.5 5429.88,4898.5 5474.99,4853.39 5760.79,4853.39 5787.4,4826.77 6122.05,4826.77 v2(6204.73,4909.45)
  Bottom Layer w5: v2(6137.8,5031.5) U7.D9@6153.54,5015.75 6204.73,4964.57 v2(6204.73,4909.45)
D22: U1.V8 U5.60 U7.D8 | length 2310.9
  Top Layer w5: U1.V8@4598.43,5165.35 v1(4618.11,5145.67) ; U5.60@6062.99,5417.32 6062.99,5380.28 6122.05,5321.23 6122.05,5145.67 6153.54,5114.17 6153.54,5055.12 6145.67,5047.24 6122.05,5047.24 v2(6106.3,5031.5) 6090.55,5015.75 6090.55,4921.26 v2(6106.3,4905.51)
  MidLayer2 w5: v1(4618.11,5145.67) 4637.8,5125.98 4637.8,5055.12 4667.48,5025.43 4742.28,5025.43 4792.28,4975.43 4804.1,4975.43 4838.9,4940.63 5041.5,4940.63 5053.62,4928.5 5477.01,4928.5 5522.13,4883.39 5809.21,4883.39 5830.4,4862.21 6062.99,4862.21 v2(6106.3,4905.51)
  Bottom Layer w5: v2(6106.3,5031.5) U7.D8@6122.05,5015.75
D23: U1.V5 U5.59 U7.E9 | length 2601.6
  Top Layer w5: U1.V5@4480.32,5165.35 v1(4500,5145.67) ; U5.59@6047.25,5417.32 6047.25,5381.89 6106.3,5322.84 6106.3,5094.49 v2(6137.8,5062.99)
  MidLayer2 w5: v1(4500,5145.67) 4480.32,5125.98 4480.32,5055.12 4636.3,4899.13 4982.76,4899.13 4993.39,4888.5 5414.65,4888.5 5459.77,4843.39 5743.23,4843.39 5771.65,4814.96 6137.8,4814.96 v2(6232.28,4909.45)
  Bottom Layer w5: v2(6137.8,5062.99) U7.E9@6153.54,5047.24 6177.17,5023.62 6177.17,5007.87 6232.28,4952.76 v2(6232.28,4909.45)
D24: U1.U13 U5.58 U7.E1 | length 1634
  Top Layer w5: U1.U13@4795.28,5204.72 v1(4814.96,5185.04) ; v2(5917.32,5062.99) 5901.58,5078.74 5901.58,5167.07 5915.18,5180.67 5915.18,5265.57 6031.5,5381.89 U5.58@6031.5,5417.32
  MidLayer2 w5: v1(4814.96,5185.04) 4834.65,5204.72 5114.17,5204.72 5137.8,5181.1 5330.71,5181.1 5358.27,5153.54 5523.62,5153.54 5562.99,5114.17 5866.14,5114.17 v2(5917.32,5062.99)
  Bottom Layer w5: U7.E1@5901.58,5047.24 v2(5917.32,5062.99)
D25: U1.U14 U5.57 U7.D2 | length 1637
  Top Layer w5: U1.U14@4834.65,5204.72 v1(4854.33,5185.04) ; v2(5917.32,5031.5) 5876.62,5072.21 5876.62,5241.15 6015.75,5380.29 U5.57@6015.75,5417.32
  MidLayer2 w5: v1(4854.33,5185.04) 4874.02,5165.35 5220.47,5165.35 5342.52,5043.31 5905.51,5043.31 v2(5917.32,5031.5)
  Bottom Layer w5: v2(5917.32,5031.5) U7.D2@5933.07,5015.75
D26: U1.V17 U5.56 U7.D1 | length 1462.5
  Top Layer w5: U1.V17@4952.76,5165.35 v1(4972.44,5145.67) ; v2(5877.95,5023.62) 5866.62,5034.96 5866.62,5245.29 6000,5378.68 U5.56@6000,5417.32
  MidLayer2 w5: v1(4972.44,5145.67) 5023.62,5145.67 5043.31,5125.98 5212.6,5125.98 5305.28,5033.31 5659.61,5033.31 5669.29,5023.62 v2(5877.95,5023.62)
  Bottom Layer w5: v2(5877.95,5023.62) U7.D1@5901.58,5015.75
D27: U1.V16 U5.54 U7.C2 | length 1616.4
  Top Layer w5: U1.V16@4913.39,5165.35 v1(4933.07,5145.67) ; v2(5917.32,5000) 5897.64,5000 5891.73,5005.91 5872.05,5005.91 5856.62,5021.34 5856.62,5249.44 5968.51,5361.33 U5.54@5968.51,5417.32
  MidLayer2 w5: v1(4933.07,5145.67) 4952.76,5125.98 5023.62,5125.98 5062.99,5086.61 5216.54,5086.61 5283.78,5019.37 5545.43,5019.37 5572.68,4992.13 5657.48,4992.13 5669.29,5003.94 5897.64,5003.94 5901.58,5000 v2(5917.32,5000)
  Bottom Layer w5: v2(5917.32,5000) U7.C2@5933.07,4984.25
D28: U1.V15 U5.53 U7.C1 | length 1663.7
  Top Layer w5: U1.V15@4874.02,5165.35 v1(4893.7,5145.67) ; v2(5877.95,4988.19) 5864.68,4988.19 5846.62,5006.25 5846.62,5253.58 5952.76,5359.72 U5.53@5952.76,5417.32
  MidLayer2 w5: v1(4893.7,5145.67) 4913.39,5125.98 4913.39,5059.06 4925.2,5047.24 5070.87,5047.24 5100.24,5076.61 5198.98,5076.61 5266.22,5009.37 5533.94,5009.37 5561.18,4982.13 5663.23,4982.13 5669.29,4988.19 v2(5877.95,4988.19)
  Bottom Layer w5: v2(5877.95,4988.19) U7.C1@5901.58,4984.25
D29: U1.V14 U5.52 U7.B2 | length 1792.5
  Top Layer w5: U1.V14@4834.65,5165.35 v1(4854.33,5145.67) ; v2(5917.32,4968.5) 5870.22,4968.5 5836.62,5002.11 5836.62,5257.72 5937.01,5358.11 U5.52@5937.01,5417.32
  MidLayer2 w5: v1(4854.33,5145.67) 4874.02,5125.98 4874.02,5055.12 4893.7,5035.43 5081.07,5035.43 5096.82,5051.18 5141.73,5051.18 5165.36,5027.56 5216.54,5027.56 5244.73,4999.37 5525.75,4999.37 5552.99,4972.13 5655.67,4972.13 5659.29,4968.5 v2(5917.32,4968.5)
  Bottom Layer w5: v2(5917.32,4968.5) U7.B2@5933.07,4952.76
D30: U1.V13 U5.51 U7.B1 | length 1786.4
  Top Layer w5: U1.V13@4795.28,5165.35 v1(4814.96,5145.67) ; v2(5877.95,4952.76) 5862.21,4952.76 5826.62,4988.35 5826.62,5261.86 5921.26,5356.51 U5.51@5921.26,5417.32 U5.51@5918.96,5415.02
  MidLayer2 w5: v1(4814.96,5145.67) 4834.65,5125.98 4834.65,5055.12 4864.33,5025.43 5084.8,5025.43 5102.36,5007.87 5145.67,5007.87 5173.23,4980.32 5527.56,4980.32 5570.87,4937.01 5677.17,4937.01 5692.91,4952.76 v2(5877.95,4952.76)
  Bottom Layer w5: v2(5877.95,4952.76) U7.B1@5901.58,4952.76
D31: U1.U12 U5.50 U7.A2 | length 1960.1
  Top Layer w5: U1.U12@4755.91,5204.72 v1(4775.59,5185.04) ; U5.50@5905.51,5417.32 5905.51,5354.9 5816.62,5266 5816.62,4982.6 5862.21,4937.01 v2(5917.32,4937.01)
  MidLayer2 w5: v1(4775.59,5185.04) 4795.28,5165.35 4795.28,5055.12 4834.96,5015.43 5051.5,5015.43 5098.43,4968.5 5519.69,4968.5 5562.99,4925.2 5712.6,4925.2 5724.41,4937.01 v2(5917.32,4937.01)
  Bottom Layer w5: v2(5917.32,4937.01) U7.A2@5933.07,4921.26
DEBUG_TCK: P2.9 R63.2 U6.10 | length 1026.9
  Top Layer w5: U6.10@6299.21,7019.69 v1(6299.21,7102.36)
  MidLayer2 w5: P2.9@6042.13,7624.8 6110.24,7692.91 6263.78,7692.91 6295.28,7661.42 6295.28,7401.58 6263.78,7370.08 6263.78,7137.8 v1(6299.21,7102.36)
  Bottom Layer w5: R63.2@6299.21,7039.37 v1(6299.21,7102.36)
DEBUG_TDI: P2.5 R61.2 U6.6 | length 915.7
  Top Layer w5: U6.6@6275.59,6799.21 6275.59,6800.2 v1(6275.59,6854.33)
  MidLayer2 w5: P2.5@6242.13,7624.8 6192.91,7575.59 6192.91,7421.26 6244.1,7370.08 6244.1,7043.31 6275.59,7011.81 v1(6275.59,6854.33)
  Bottom Layer w5: R61.2@6275.59,6818.9 v1(6275.59,6854.33)
DEBUG_TMS: P2.7 R62.2 U6.13 | length 768.8
  Top Layer w5: v1(6216.54,6968.5) 6216.54,6984.25 U6.13@6224.41,6992.13
  MidLayer2 w5: P2.7@6133.5,7616.17 6094.49,7577.17 6094.49,7421.26 6141.73,7374.02 6141.73,7173.23 6169.29,7145.67 6169.29,7015.75 v1(6216.54,6968.5)
  Bottom Layer w5: v1(6216.54,6968.5) R62.2@6216.54,6996.06
DEOT0: U1.L18 U5.148 | length 1722.2
  Top Layer w5: U1.L18@4992.13,5440.95 v1(5011.81,5460.63) ; v2(6267.72,6204.72) U5.148@6267.72,6251.97
  MidLayer2 w5: v1(5011.81,5460.63) 5031.5,5480.32 5161.42,5480.32 5307.09,5625.98 5307.09,5767.72 5695.36,6155.98 6175.67,6155.98 6224.41,6204.72 v2(6267.72,6204.72)
DREQ0: U1.M18 U5.146 | length 1773.3
  Top Layer w5: U1.M18@4992.13,5401.58 v1(5011.81,5421.26) ; v2(6299.21,6204.72) U5.146@6299.21,6251.97
  MidLayer2 w5: v1(5011.81,5421.26) 5031.5,5440.95 5141.73,5440.95 5322.84,5622.05 5322.84,5769.32 5699.5,6145.98 6197.17,6145.98 6240.16,6188.98 6283.47,6188.98 v2(6299.21,6204.72)
FLASH_BUSY: R20.1 U5.114 U8.C4 | length 1444.8
  Top Layer w5: v1(6204.73,5531.5) 6311.02,5531.5 6413.39,5633.86 6413.39,5755.91 6547.25,5889.76 U5.114@6582.68,5889.76
  Bottom Layer w5: U8.C4@5535.43,5330.71 5535.43,5389.76 5555.12,5409.45 5649.61,5409.45 5665.36,5393.7 6019.69,5393.7 6137.8,5511.81 6185.04,5511.81 v1(6204.73,5531.5) 6232.28,5503.94 R20.1@6240.16,5503.94
FPGA_AUX0: R14.1 U1.B3 | length 2154.2
  Top Layer w5: U1.B3@4401.58,5795.28 4421.26,5814.96 v1(4421.26,5854.33)
  MidLayer3 w5: v1(4421.26,5854.33) 4472.44,5905.51 4472.44,6070.87 5200.79,6799.21 5460.63,6799.21 5555.12,6893.7 5657.48,6893.7 5692.91,6858.27 5728.35,6858.27 v1(5751.97,6881.89)
  Bottom Layer w5: v1(5751.97,6881.89) 5834.65,6881.89 5842.52,6874.02 5842.52,6843.5 5849.41,6836.61 R14.1@5889.77,6836.61 5883.86,6842.52 R14.1@5866.14,6842.52 ; R14.1@5889.77,6858.27 R14.1@5893.7,6858.27
FPGA_AUX0_R: HDR1.86 R14.2 | length 120.4
  Bottom Layer w5: R14.2@5889.77,6761.81 5889.77,6716.54 5909.45,6696.85 HDR1.86@5909.45,6649.61
FPGA_AUX1: HDR1.88 U1.F12 | length 1934.5
  Top Layer w5: v1(4736.22,5657.48) U1.F12@4755.91,5637.8
  MidLayer2 w5: v1(4736.22,5657.48) 4755.91,5677.17 4755.91,5787.4 4811.02,5842.52 4811.02,5972.44 5212.6,6374.02 5598.43,6374.02 v1(5960.63,6736.22)
  Bottom Layer w5: HDR1.88@5940.95,6649.61 5940.95,6716.54 v1(5960.63,6736.22)
FPGA_AUX2: HDR1.90 U1.F14 | length 1842.6
  Top Layer w5: v1(4814.96,5657.48) U1.F14@4834.65,5637.8
  MidLayer2 w5: v1(4814.96,5657.48) 4834.65,5677.17 4834.65,5976.38 5216.54,6358.27 5614.17,6358.27 v1(5960.63,6704.72)
  Bottom Layer w5: v1(5960.63,6704.72) 5972.44,6692.91 HDR1.90@5972.44,6649.61
FPGA_AUX3: HDR1.92 U1.F11 | length 2016.7
  Top Layer w5: v1(4696.85,5657.48) U1.F11@4716.54,5637.8
  MidLayer2 w5: v1(4696.85,5657.48) 4716.54,5677.17 4716.54,5787.4 4787.4,5858.27 4787.4,5968.5 5208.66,6389.76 5582.68,6389.76 v1(5960.63,6767.72)
  Bottom Layer w5: v1(5960.63,6767.72) 5980.32,6748.03 5980.32,6716.54 6003.94,6692.91 HDR1.92@6003.94,6649.61
FPGA_CCLK: R3.2 U1.AA22 | length 2270.8
  Top Layer w5: U1.AA22@5149.61,5047.24 v1(5177.17,5047.24)
  MidLayer3 w5: v1(5177.17,5047.24) 5129.92,5094.49 5129.92,5738.55 5029.06,5839.42 5029.06,6269.21 5444.88,6685.04 5570.87,6685.04 5582.68,6696.85 5582.68,6724.41 5566.93,6740.16 5566.93,6838.58 v1(5590.55,6862.21)
  Bottom Layer w5: R3.2@5551.18,6842.52 5570.87,6862.21 v1(5590.55,6862.21)
FPGA_CCLK_R: HDR1.66 R3.1 | length 107.5
  Bottom Layer w5: R3.1@5562.99,6744.1 5594.49,6712.6 HDR1.66@5594.49,6649.61
FPGA_CLK: HDR2.2 U1.AA11 | length 484.1
  Top Layer w5: U1.AA11@4716.54,5047.24 4736.22,5027.56 4736.22,4968.5 v1(4755.91,4948.82)
  MidLayer3 w5: v1(4590.55,4732.28) 4590.55,4783.47 v1(4755.91,4948.82)
  Bottom Layer w5: HDR2.2@4586.62,4649.61 4586.62,4704.72 4590.55,4708.66 v1(4590.55,4732.28)
FPGA_CLK_1: HDR1.30 U1.F3 | length 2140.5
  Top Layer w5: v1(4381.89,5618.11) U1.F3@4401.58,5637.8
  Bottom Layer w5: v1(4381.89,5618.11) 4377.95,5618.11 4231.97,5764.1 4231.97,6382.21 4179.62,6434.56 4179.62,6598.61 4413.62,6832.61 4887.87,6832.61 5027.56,6692.92 HDR1.30@5027.56,6649.61
FPGA_CLK_2: HDR1.32 U1.G4 | length 2319.9
  Top Layer w5: v1(4421.26,5578.74) U1.G4@4440.95,5598.43
  Bottom Layer w5: v1(4421.26,5578.74) 4401.58,5598.43 4283.47,5598.43 4220.47,5661.42 4220.47,6377.95 4169.62,6428.81 4169.62,6603.61 4408.62,6842.61 4909.36,6842.61 5059.05,6692.92 HDR1.32@5059.05,6649.61
FPGA_DIN: HDR1.64 U1.AA14 | length 2390.7
  Top Layer w5: U1.AA14@4834.65,5047.24 4854.33,5027.56 v1(4854.33,4984.25)
  MidLayer3 w5: v1(4854.33,4984.25) 4905.51,5035.43 5074.8,5035.43 5118.11,5078.74 5118.11,5736.22 5019.06,5835.28 5019.06,6278.9 5444.88,6704.72 v1(5562.99,6704.72)
  Bottom Layer w5: HDR1.64@5562.99,6649.61 v1(5562.99,6704.72)
FPGA_DONE: R4.2 R15.1 U1.AB21 U2.2 | length 4154.8
  Top Layer w5: v1(4122.05,4114.17) U2.2@4122.05,4162.4 ; U1.AB21@5110.24,5007.87 v1(5129.92,4988.19) ; v1(5590.55,6748.03) 5633.86,6791.34 R15.1@5665.36,6791.34
  MidLayer2 w5: v1(4122.05,4114.17) 4303.15,4295.28 v1(4980.32,4295.28)
  MidLayer3 w5: v1(4980.32,4295.28) 4980.32,4838.58 v1(5129.92,4988.19) 5188.98,4988.19 5196.85,4996.06 5196.85,5059.06 5141.73,5114.17 5141.73,5740.88 5039.06,5843.56 5039.06,6255.59 5448.82,6665.35 5566.93,6665.35 5602.36,6700.79 5602.36,6736.22 v1(5590.55,6748.03)
  Bottom Layer w5: v1(5590.55,6748.03) 5590.55,6795.28 R4.2@5629.92,6834.65
FPGA_DONE_R: HDR1.74 R4.1 | length 181
  Bottom Layer w5: R4.1@5637.8,6761.81 5637.8,6728.35 5641.73,6724.41 5700.79,6724.41 5720.47,6704.72 HDR1.74@5720.47,6649.61
FPGA_INIT: HDR1.68 R18.1 R19.1 | length 3145.1
  Top Layer w5: R19.1@4992.13,4157.48 5011.81,4157.48 v1(5023.62,4169.29) ; v1(5625.99,6704.72) 5625.99,6728.35 5641.73,6744.1 R18.1@5665.36,6744.1
  MidLayer3 w5: v1(5023.62,4169.29) 5055.12,4200.79 5055.12,4748.03 5208.66,4901.58 5208.66,5070.87 5151.73,5127.8 5151.73,5745.03 5049.06,5847.7 5049.06,6241.97 5452.76,6645.67 5566.93,6645.67 v1(5625.99,6704.72)
  Bottom Layer w5: HDR1.68@5625.98,6649.61 v1(5625.99,6704.72)
FPGA_M0: R8.2 U1.AB2 | length 1450.4
  Top Layer w5: v1(4066.93,6169.29) R8.2@4066.93,6214.57 R8.2@4066.93,6216.54 ; U1.AB2@4362.21,5007.87 4362.21,4960.63 v1(4366.14,4956.69)
  MidLayer1 w5: v1(4066.93,6169.29) 4082.68,6153.54 4082.68,5811.02 4169.29,5724.41 4169.29,5475.65 4275.59,5369.35 4275.59,5173.23 4299.21,5149.61 4299.21,5000 4342.52,4956.69 v1(4366.14,4956.69)
FPGA_M0_R: HDR1.60 R8.1 | length 2036.4
  Top Layer w5: R8.1@4066.93,6289.37 v1(4066.93,6334.65)
  Bottom Layer w5: v1(4066.93,6334.65) 4066.93,6625.98 4370.08,6929.13 4937.8,6929.13 5070.33,6796.61 5396.31,6796.61 5500,6692.91 HDR1.60@5500,6649.61
FPGA_M1: R9.2 U1.AA1 | length 987.9
  Top Layer w5: v1(4106.3,5838.58) 4106.3,5883.86 R9.2@4106.3,5889.76 ; U1.AA1@4322.84,5047.24 v1(4342.52,5027.56)
  MidLayer1 w5: v1(4106.3,5838.58) 4181.1,5763.78 4181.1,5477.98 4318.9,5340.19 4318.9,5051.18 v1(4342.52,5027.56)
FPGA_M1_R: HDR1.58 R9.1 | length 2306.1
  Top Layer w5: R9.1@4102.36,5958.66 v1(4102.36,6066.93)
  Bottom Layer w5: v1(4102.36,6066.93) 4102.36,6090.55 4094.49,6098.43 4094.49,6633.86 4377.95,6917.32 4935.47,6917.32 5066.18,6786.61 5374.81,6786.61 5468.5,6692.91 HDR1.58@5468.5,6649.61
FPGA_M2: R10.2 U1.AB3 | length 1351
  Top Layer w5: v1(4133.86,6169.29) R10.2@4133.86,6208.66 ; v1(4381.89,4988.19) U1.AB3@4401.58,5007.87
  MidLayer1 w5: v1(4133.86,6169.29) 4192.91,6110.24 4192.91,5480.32 4330.4,5342.84 4330.4,5086.93 4362.21,5055.12 4362.21,5007.87 v1(4381.89,4988.19)
FPGA_M2_R: HDR1.56 R10.1 | length 1933.1
  Top Layer w5: R10.1@4145.67,6289.37 v1(4145.67,6334.65)
  Bottom Layer w5: v1(4145.67,6334.65) 4106.3,6374.02 4106.3,6629.92 4381.89,6905.51 4933.14,6905.51 5062.04,6776.61 5353.31,6776.61 5437.01,6692.91 HDR1.56@5437.01,6649.61
FPGA_PROGRAM_R: HDR1.62 R7.1 R17.1 | length 546.2
  Top Layer w5: R17.1@5137.8,6893.7 v1(5169.29,6893.7)
  Bottom Layer w5: R7.1@5169.29,6842.52 5175.2,6842.52 5212.6,6842.52 5248.51,6806.61 5417.8,6806.61 5531.5,6692.91 HDR1.62@5531.5,6649.61 ; R7.1@5169.29,6846.46 v1(5169.29,6893.7)
FPGA_PROGRAMP: R7.2 U1.A2 | length 1361.8
  Top Layer w5: U1.A2@4362.21,5834.65 v1(4381.89,5854.33)
  MidLayer3 w5: v1(4381.89,5854.33) 4381.89,5885.83 4429.14,5933.07 4429.14,6086.61 5055.12,6712.6 v1(5055.12,6862.21)
  Bottom Layer w5: v1(5055.12,6862.21) 5100.4,6862.21 R7.2@5102.36,6862.21
FPGA_TCK: HDR1.72 R12.1 U6.11 | length 1036.4
  Top Layer w5: v1(5688.98,6704.72) 5688.98,6665.35 5763.78,6590.55 R12.1@5763.78,6553.15 ; U6.11@6275.59,7019.69 v1(6275.59,7070.87)
  MidLayer3 w5: v1(5688.98,6704.72) 5688.98,6720.47 5960.63,6992.13 6196.85,6992.13 v1(6275.59,7070.87)
  Bottom Layer w5: HDR1.72@5688.98,6649.61 v1(5688.98,6704.72)
FPGA_TCKP: R12.2 U1.A21 | length 926.9
  Top Layer w5: U1.A21@5110.24,5834.65 v1(5129.92,5854.33) ; v1(5279.53,5980.32) 5300.09,5980.32 5596.3,6276.52 5596.3,6308.9 5736.22,6448.82 R12.2@5736.22,6476.38
  MidLayer3 w5: v1(5129.92,5854.33) 5224.41,5948.82 5248.03,5948.82 v1(5279.53,5980.32)
FPGA_TDI: HDR1.78 R11.1 | length 156.7
  Bottom Layer w5: R11.1@5720.47,6761.81 5720.47,6732.28 5728.35,6724.41 5759.84,6724.41 5783.47,6700.79 HDR1.78@5783.47,6649.61
FPGA_TDIP: R11.2 U1.B1 | length 2013.1
  Top Layer w5: U1.B1@4322.84,5795.28 v1(4342.52,5814.96)
  MidLayer3 w5: v1(4342.52,5814.96) 4362.21,5834.65 4393.7,5834.65 4401.58,5842.52 4401.58,5874.02 4452.76,5925.2 4452.76,6078.74 5196.85,6822.84 5448.82,6822.84 5531.5,6905.51 5692.91,6905.51 v1(5716.54,6881.89)
  Bottom Layer w5: R11.2@5716.54,6840.55 v1(5716.54,6881.89)
FPGA_TDO: HDR1.54 R6.2 | length 702.1
  Top Layer w5: v1(5783.47,6736.22) 5783.47,6677.17 5842.52,6618.11 R6.2@5842.52,6553.15
  MidLayer1 w5: v1(5387.62,6708.61) 5450.66,6771.65 5748.03,6771.65 v1(5783.47,6736.22)
  Bottom Layer w5: v1(5387.62,6708.61) 5399.62,6696.61 HDR1.54@5399.62,6655.61
FPGA_TMS: HDR1.70 R13.1 U6.14 | length 956.4
  Top Layer w5: v1(5657.48,6704.72) 5657.48,6622.05 5685.04,6594.49 R13.1@5685.04,6553.15 ; U6.14@6196.85,7023.62 v1(6196.85,7070.87)
  MidLayer3 w5: v1(5657.48,6704.72) 5964.57,7011.81 6137.8,7011.81 v1(6196.85,7070.87)
  Bottom Layer w5: HDR1.70@5657.48,6649.61 v1(5657.48,6704.72)
FPGA_TMSP: R13.2 U1.A20 | length 952.6
  Top Layer w5: U1.A20@5070.87,5834.65 5070.87,5846.46 5078.74,5854.33 v1(5078.74,5866.14) ; v1(5244.1,5980.32) 5266.09,6002.31 5307.95,6002.31 5586.3,6280.66 5586.3,6313.04 5685.04,6411.78 R13.2@5685.04,6478.35
  MidLayer3 w5: v1(5078.74,5866.14) 5192.91,5980.32 v1(5244.1,5980.32)